# EAGLE board Default Layout (EAGLE 8.5.0)
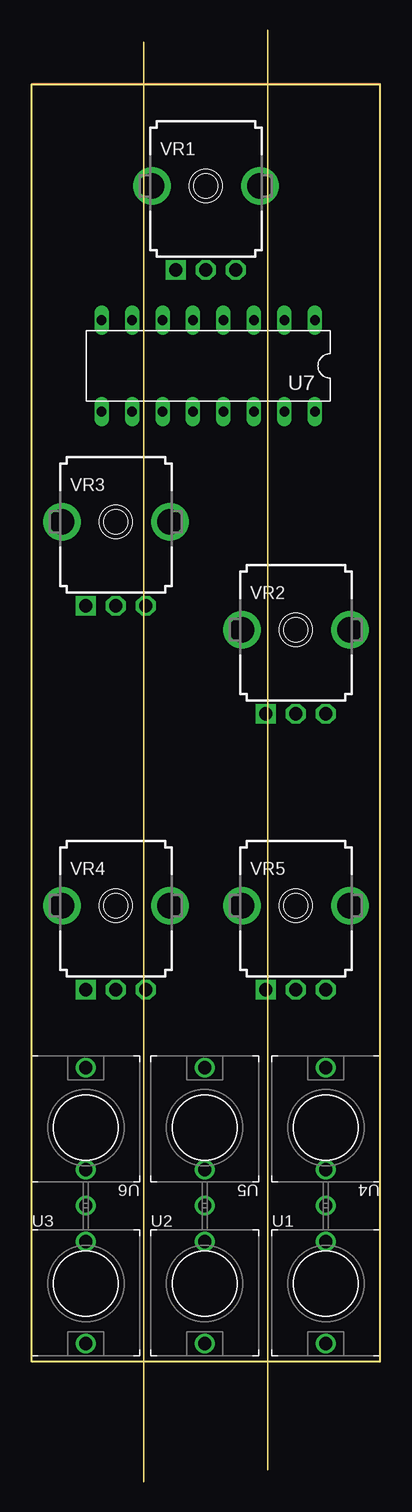
[diagram p0: board, top side]

Size 29 x 121 mm. Coordinates in mm from the lower left corner, seen from the top.
Outline: 9.33,120 9.33,0
Outline: 19.67,121 19.67,1
Outline: 0,10 0,116.5 29,116.5 29,10 0,10
Copper layers (1*16): Top 0.035559375mm / dielectric 1.6mm / Bottom 0.035559375mm
Design rules "oshpark-2layer": minimum track width 6mil, minimum drill 10mil, track to track 6mil, track to pad 6mil, pad to pad 6mil, via to via 6mil, smd to smd 6mil, copper to edge 15mil, drill to drill 6mil, minimum pad ring 5mil, minimum via ring 5mil, stop-mask expansion 2.5mil, vias tented up to drill 0mil, thermal gap 10mil

## Footprints (pad centres in the part's own frame; a part is rotated, then mirrored left to right if it is on the bottom)
WQP-PJ301M-12_JACK = drill 1.1: P$1_TIP 0,5; P$2_SWITCH 0,-3.5; P$3_SLEEVE 0,-6.5
DIL16 = drill 0.813 long: 1 -8.89,-3.81; 2 -6.35,-3.81; 3 -3.81,-3.81; 4 -1.27,-3.81; 5 1.27,-3.81; 6 3.81,-3.81; 7 6.35,-3.81; 8 8.89,-3.81; 9 8.89,3.81; 10 6.35,3.81; 11 3.81,3.81; 12 1.27,3.81; 13 -1.27,3.81; 14 -3.81,3.81; 15 -6.35,3.81; 16 -8.89,3.81
9MM_SNAP-IN_POT = drill 1.1 square: 1 -2.5,-7 | drill 1.1 octagon: 2 0,-7; 3 2.5,-7 | drill 2.1 pad 2.794: CHASSIS1 -4.5,0; CHASSIS2 4.5,0

## Placement (x,y rotation side)
U1  THONKICONNNEW  [WQP-PJ301M-12_JACK]  24.5,16.5 180 top
U2  THONKICONNNEW  [WQP-PJ301M-12_JACK]  14.4,16.5 180 top
U3  THONKICONNNEW  [WQP-PJ301M-12_JACK]  4.5,16.5 180 top
U4  THONKICONNNEW  [WQP-PJ301M-12_JACK]  24.5,29.5 0 top
U5  THONKICONNNEW  [WQP-PJ301M-12_JACK]  14.4,29.5 0 top
U6  THONKICONNNEW  [WQP-PJ301M-12_JACK]  4.5,29.5 0 top
U7  DAC0800  [DIL16]  14.7,93 180 top
VR1  [9MM_SNAP-IN_POT]  14.5,108 0 top
VR2  [9MM_SNAP-IN_POT]  22,71 0 top
VR3  [9MM_SNAP-IN_POT]  7,80 0 top
VR4  [9MM_SNAP-IN_POT]  7,48 0 top
VR5  [9MM_SNAP-IN_POT]  22,48 0 top

## Library data of the parts
U1-U7 VR1-VR5 = MusicThingModular

## Tracks (layer width: path | path; a pad name or v marks a point on that pad's centre or on a via)
N$1
  Top 0.152: 29,116.5 0,116.5